# Altium PCB USB_UART_C.PcbDoc
Units mm, origin at the board's own origin, x right, y up, seen from the top; angles counter-clockwise.
Board outline 18.16 x 15.75 mm, 4 copper layers (Top Layer, Layer 1, Layer 2, Bottom Layer), stack 0.603 mm thick; 22 components, 21 nets, 107 pads, 34 vias.
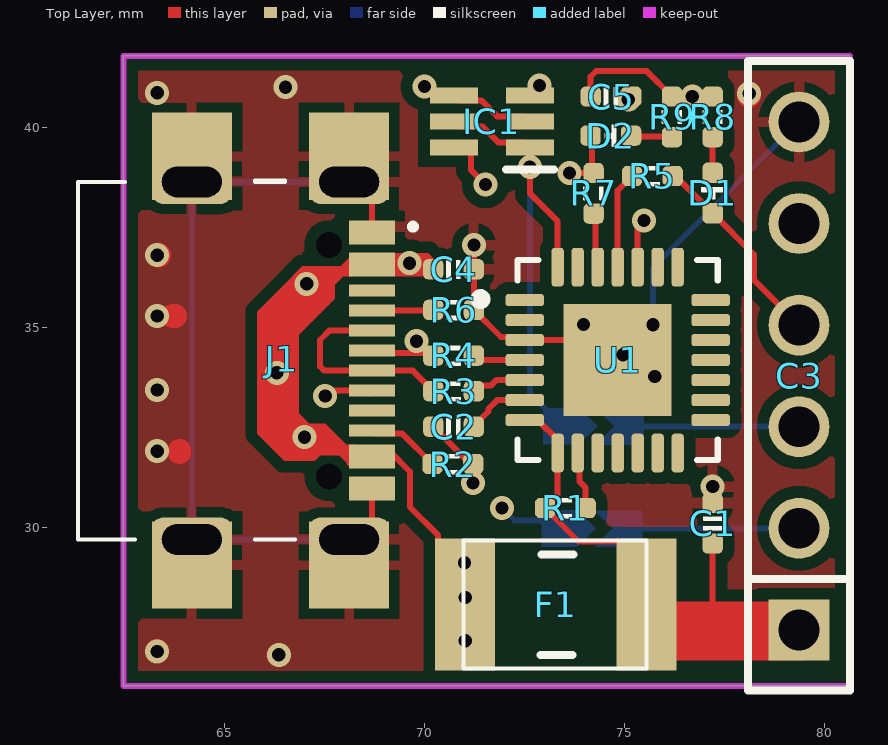
[diagram p0: Top Layer view]
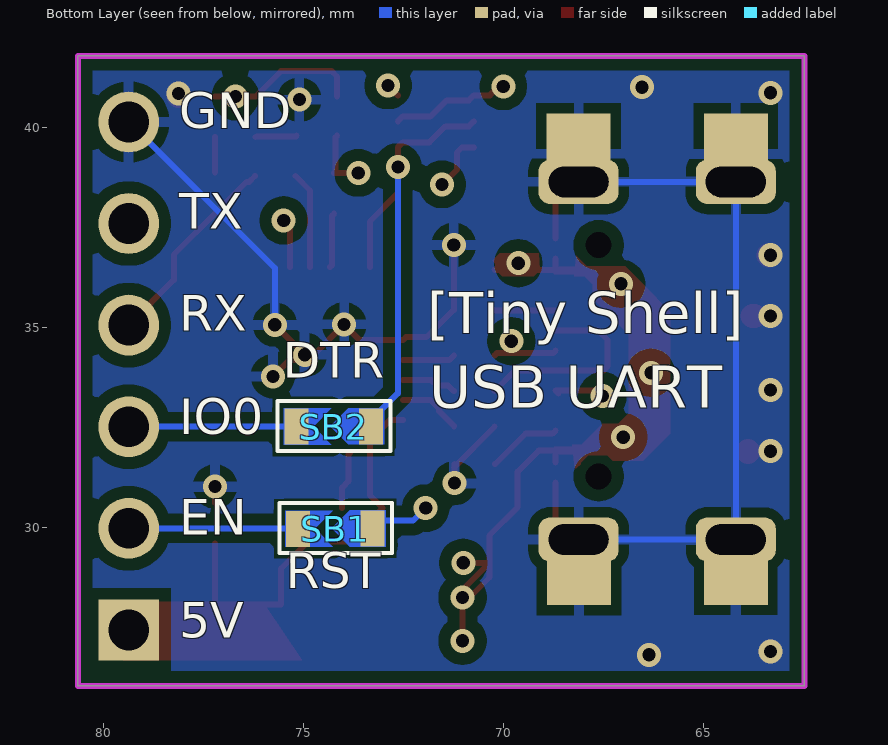
[diagram p1: Bottom Layer view, seen from below]
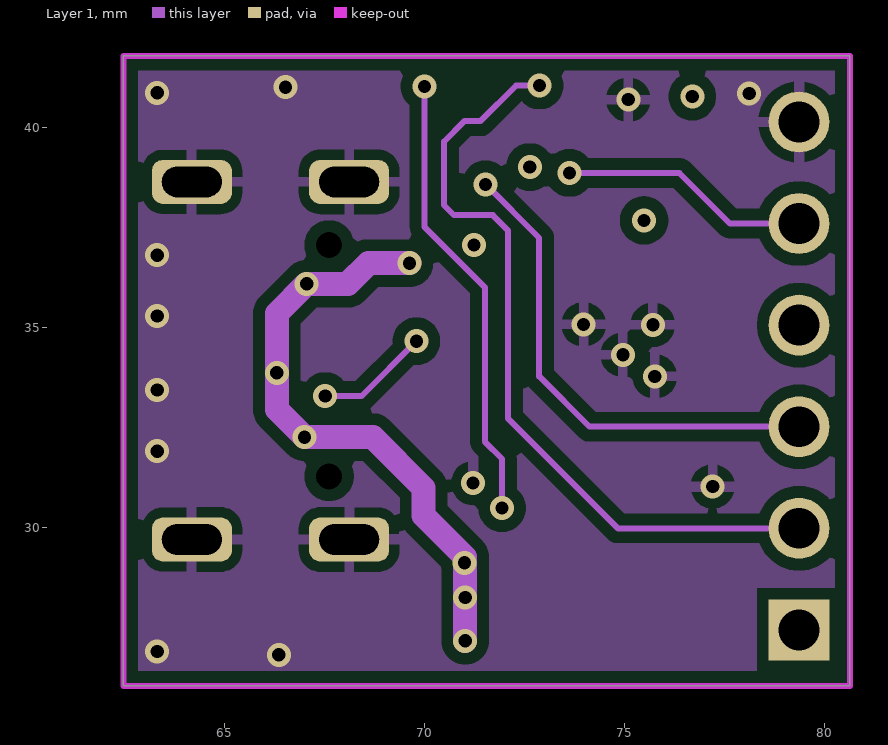
[diagram p2: Layer 1]
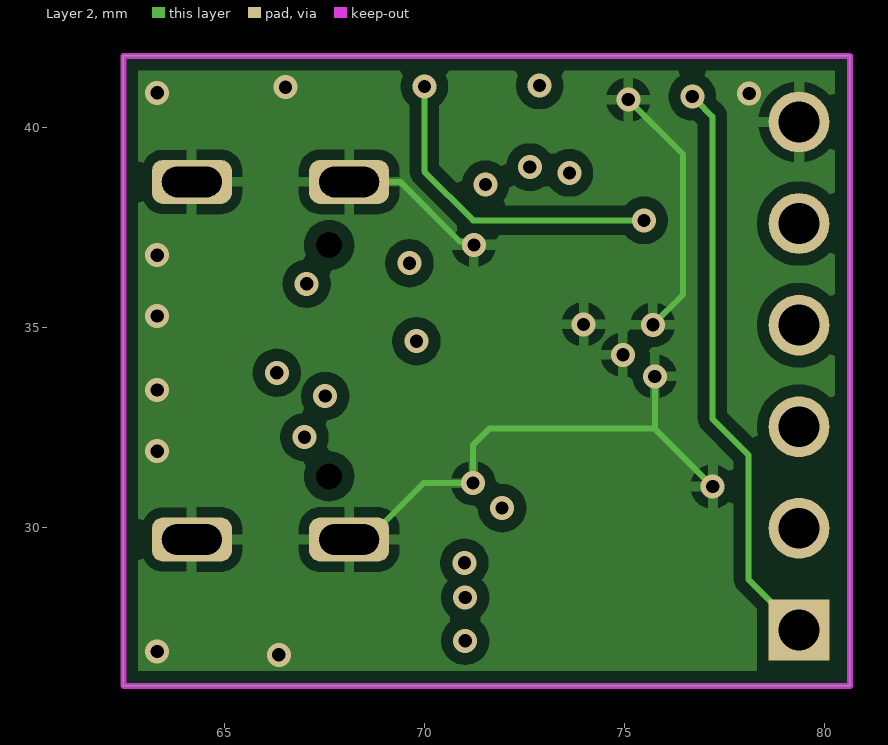
[diagram p3: Layer 2]
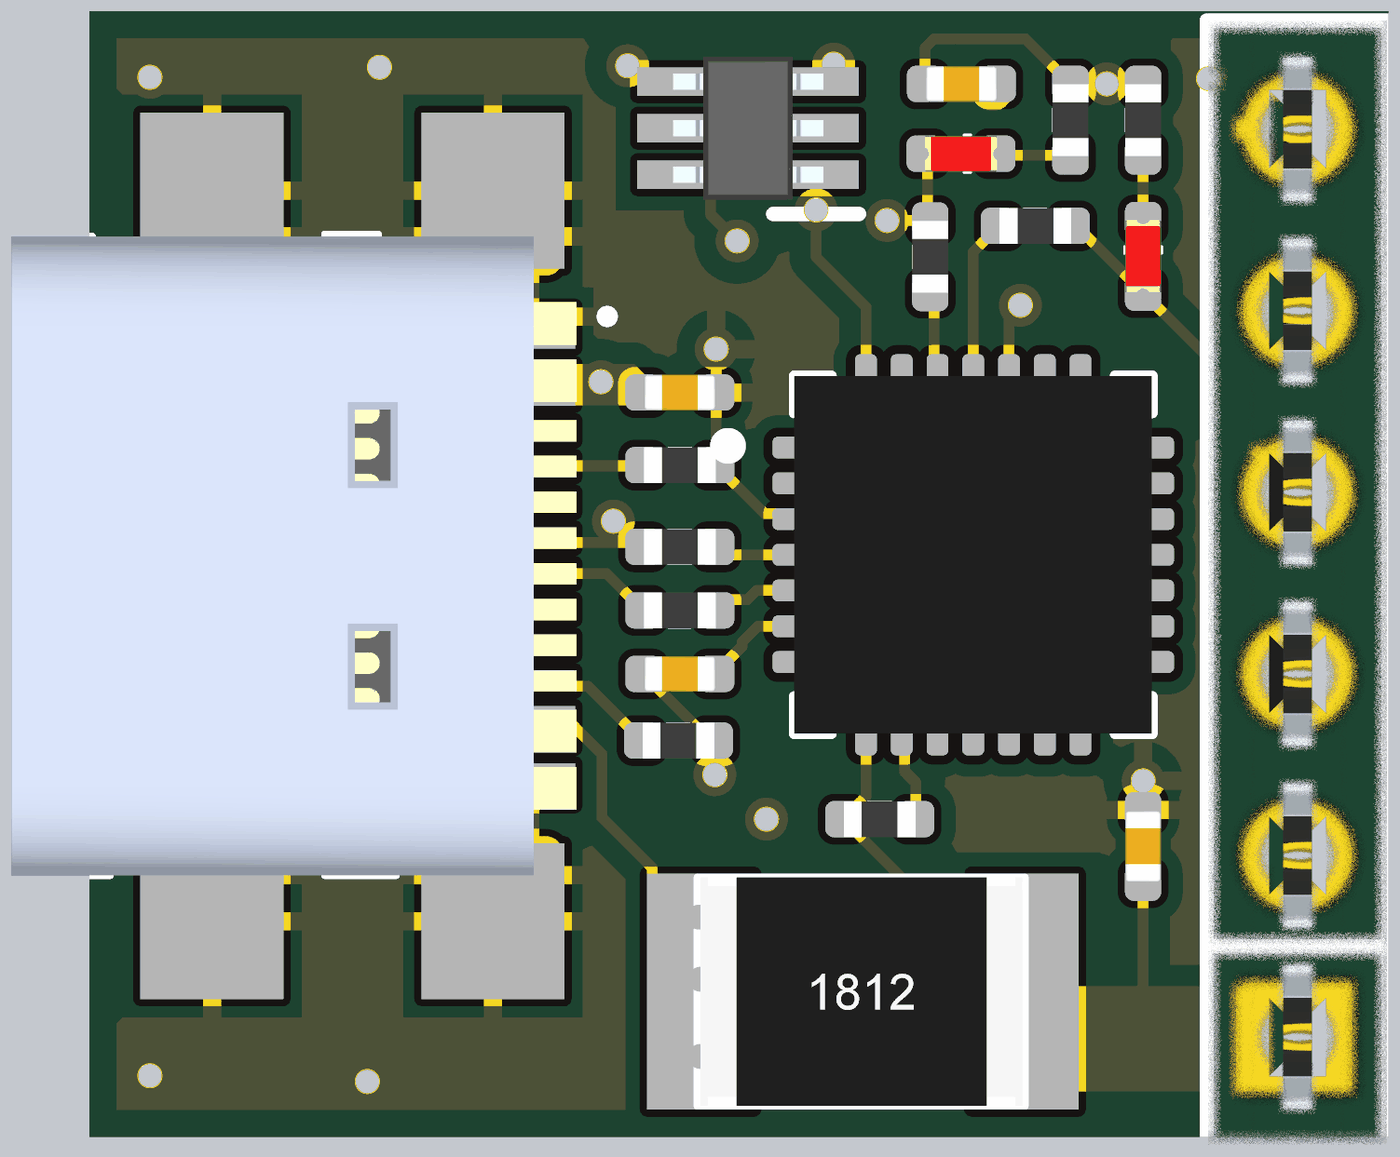
[diagram p4: 3D render of the assembled board from above, using the file's embedded part models]

## Layer stack, top to bottom
Top Solder: solder mask 0.0102, Solder Resist, Dk 3.5
Top Layer: signal copper 0.0356
Dielectric 2: prepreg 0.0711, PP-006, Dk 4.1
Layer 1: signal copper 0.035
Dielectric 1: dielectric 0.32, FR-4, Dk 4.8
Layer 2: signal copper 0.035
Dielectric 3: prepreg 0.0711, PP-006, Dk 4.1
Bottom Layer: signal copper 0.0356
Bottom Solder: solder mask 0.0102, Solder Resist, Dk 3.5

## Board outline
62.484,26.035 80.645,26.035 80.645,41.783 62.484,41.783

## Design rules (kind name [scope] priority, off if disabled: settings)
Clearance [All] p1: gap=0.18 ignorepadtopadclearanceinfootprint=FALSE
PolygonConnect [All] p1: connectstyle=Relief reliefconductorwidth=0.254 reliefentries=4 polygonreliefangle="90 Angle" airgapwidth=0.254
RoutingVias [All] p1: holewidth=0.33 width=0.6 viastyle="Through Hole" minholewidth=0.33 minwidth=0.6 maxholewidth=0.33 maxwidth=0.6
SolderMaskExpansion [All] p1: expansion=0.102 istentingtop=FALSE
Width [All] p1: maxlimit=0.6 minlimit=0.15 preferedwidth=0.2
30 further rules are at their usual default settings.

## Classes and differential pairs
component class USB_UART_C: C1 C2 C3 C4 C5 D1 D2 F1 IC1 J1 R1 R3 R5 R7 R8 R9 SB1 SB2 U1

## Components (designator, comment, footprint, x,y, rotation, side; value= is the part's Value field where it differs from the comment)
C1 "104" CAP_0402 77.216,30.099 r90 top value=103
C2 "104" CAP_0402 70.739,32.512 r0 top value=103
C3 "JP6" JP6-C1T 79.375,27.432 r90 top
C4 "106" CAP_0402 70.739,36.449 r0 top value=103
C5 "106" CAP_0402 74.676,40.767 r0 top value=103
D1 "color?" LED_0402_RED 77.216,38.354 r270 top
D2 "color?" LED_0402_RED 74.67,39.79 r180 top
F1 "Fuse" RES-SMD-1812 73.025,28.067 r0 top
IC1 "2N7002DW" SOT65P210X110-6N 71.694,40.147 r180 top
J1 "USB4110-GF-A" USB4110GFA 65.024,34.163 r270 top locked
R1 "5K1" RES_0402 73.533,30.48 r180 top
R2 "5K1" RES_0402 70.72,31.58 r0 top
R3 "22R" RES_0402 70.739,33.401 r0 top
R4 "22R" RES_0402 70.739,34.29 r0 top
R5 "200R" RES_0402 75.71,38.78 r0 top
R6 "5K1" RES_0402 70.739,35.433 r0 top
R7 "200R" RES_0402 74.24,38.348 r90 top
R8 "5K1" RES_0402 77.216,40.259 r90 top
R9 "5K1" RES_0402 76.2,40.259 r90 top
SB1 "SB" SB_0603 72.689,31.157 r0 bottom
SB2 "SB" SB_0603 72.729,33.708 r0 bottom
U1 "CP2102" QFN-28 74.841,34.179 r0 top value=Value

## Footprints (in the part's own frame and the unit in brackets; to place one, negate y for a bottom-side part, rotate by r counter-clockwise, add the part's x,y. Pads: shape width x height; smd on the part's side, far side on the other; paste and mask are expansions set on the pad)
CAP_0402 [mil]
  rrect50% 20x20 smd: 1(-20,0) 2(20,0)
  silkscreen extent -7,-9 7,9, body extent -20,-10 20,10, height 20
JP6-C1T [mm] "6 row, straight, gold plating"
  rect 1.52x1.52 hole 1.02: 1(0,0)
  round 1.52 hole 1.02: 2(2.54,0) 3(5.08,0) 4(7.62,0) 5(10.16,0) 6(12.7,0)
  silkscreen extent -1.52,-1.27 14.22,1.27, body extent -1.52,-1.25 14.22,1.25, height 8.51
LED_0402_RED [mil]
  rrect50% 20x20 smd: 1(-20,0) 2(20,0)
  silkscreen extent -6,-11 6,10, body extent -20,-10 20,10, height 18
QFN-28 [mil]
  rrect50% 38x12 smd mask+5: 1(-91.5,59.06) 2(-91.5,39.37) 3(-91.5,19.69) 4(-91.5,0) 5(-91.5,-19.68) 6(-91.5,-39.37) 7(-91.5,-59.06) 15(91.5,-59.06) 16(91.5,-39.37) 17(91.5,-19.68) 18(91.5,0) 19(91.5,19.69) 20(91.5,39.37) 21(91.5,59.06)
  rrect50% 12x38 smd mask+5: 8(-59.06,-91.5) 9(-39.37,-91.5) 10(-19.68,-91.5) 11(0,-91.5) 12(19.68,-91.5) 13(39.37,-91.5) 14(59.06,-91.5) 22(59.06,91.5) 23(39.37,91.5) 24(19.68,91.5) 25(0,91.5) 26(-19.68,91.5) 27(-39.37,91.5) 28(-59.06,91.5)
  rect 106.3x110.24 smd: 29(0,0)
  silkscreen extent -140,-98 98,98, body extent -98,-98 98,98, height 35
RES-SMD-1812 [mm] "Chip Capacitor, Body 3.2x2.5mm, IPC Medium Density"
  rect 1.5x3.3 smd: 1(-1.996,0) 2(2.54,0)
  silkscreen extent -2.04,-1.6 2.54,1.6, body extent -2,-1.6 2.5,1.6, height 0.6
RES_0402 [mil]
  rrect50% 20x20 smd: 1(-20,0) 2(20,0)
  silkscreen extent -7,-10 7,10, body extent -20,-10 20,10, height 14
SB_0603 [mm]
  rect 0.6x0.9 smd mask+0: 1(0.59,1.185) 2(2.455,1.196)
  Top Layer region: 0.254,1.64 1.157,1.64 1.609,1.189 1.157,0.737 0.256,0.739
  Top Layer region: 1.58,1.644 2.025,1.185 1.58,0.74 2.766,0.74 2.766,1.644
  silkscreen extent 0.11,0.56 2.92,1.81, body extent 0.66,0.79 2.26,1.59, height 0.43
SOT65P210X110-6N [mm]
  rect 1.2x0.4 smd: 1(-0.95,0.65) 2(-0.95,0) 3(-0.95,-0.65) 4(0.95,-0.65) 5(0.95,0) 6(0.95,0.65)
  silkscreen extent -1.55,1.2 -0.35,1.2, body extent -1.05,-1 1.05,1, height 1.1
USB4110GFA [mm]
  rect 2x1.6 smd far side: 1(-5.176,-0.827) 2(-5.176,3.103) 19(5.105,3.094) 20(5.105,-0.827)
  rect 2.18x2 smd: 1(-5.11,-0.827) 2(-5.11,3.103) 19(5.11,3.103) 20(5.11,-0.827)
  rrect50% 1.1x2 hole 1.5 slot 0.762 at 0 deg: 1(-4.47,-0.827) 2(-4.47,3.103) 19(4.47,3.103) 20(4.47,-0.827)
  rect 0.3x1.15 smd: 3(-3.35,3.678) 4(-3.05,3.678) 5(-2.55,3.678) 6(-2.25,3.678) 7(-1.75,3.678) 8(-1.25,3.678) 9(-0.75,3.678) 10(-0.25,3.678) 11(0.25,3.678) 12(0.75,3.678) 13(1.25,3.678) 14(1.75,3.678) 15(2.25,3.678) 16(2.55,3.678) 17(3.05,3.678) 18(3.35,3.678)
  round 0.325 hole 0.65 unplated: MH1(-2.89,2.603) MH2(2.89,2.603)
  silkscreen extent -4.5,-3.68 4.47,4.75, body extent -4.47,-3.63 4.47,4.27, height 3.2

## Part data
C1 C2 C4 C5: library part CM, "Cap SMD"
C3: "WR-PHD 2.54 mm Angled Socket Header", Manufacturer="W¨¹rth Elektronik eiSos GmbH", partNo=613006143121, ComponentLink1 Description=Manufacturer, ComponentLink1URL=http://www.we-online.com, ComponentLink2 Description=Datasheet, ComponentLink2URL=http://katalog.we-online.de/em/datasheet/6130xx143121.pdf, Created by="Karrer Zheng", Created Date="29 March 2013", NoPins=06
D1 D2: library part LED_0402, "LED", Type=0402
F1: library part FUSE
IC1: "Integrated Circuit", Manufacturer_Name="ON Semiconductor", Mouser Part Number=512-2N7002DW, Arrow Part Number=2N7002DW, Arrow Price/Stock=https://www.arrow.com/en/products/2n7002dw/on-semiconductor?region=nac, Datasheet Link=https://datasheet.datasheetarchive.com/originals/distributors/Datasheets_SAMA/951ecc1ab16cbf3d5524c3c8fb4b034a.pdf, Height=1.1mm, Manufacturer_Part_Number=2N7002DW, Mouser Price/Stock=https://www.mouser.co.uk/ProductDetail/ON-Semiconductor/2N7002DW?qs=4aVxpR%2FL9VItb3yGt5CeZg%3D%3D
J1: "USB TYPE C", Manufacturer_Name="GCT (GLOBAL CONNECTOR TECHNOLOGY)", Arrow Part Number=USB4110-GF-A, Datasheet Link=https://gct.co/files/drawings/usb4110.pdf, Height=3.26mm, Manufacturer_Part_Number=USB4110-GF-A
R1 R2 R3 R4 R5 R6 R7 R8 R9: library part R, "Resistor R1/4W"
U1: "USB to TTL", MFG #1="SILICON LABS", PART DESC="SINGLE-CHIP USB TO UART BRIDGE, QFN28, RoHS.", Part Number=CP2102, RefDes=RefDes, Type=DEV

## Via types
v1: diameter 0.6, hole 0.33, Top Layer to Bottom Layer, tented both sides, 34 vias

## Nets (pads, with @x,y where several pads share a name; then routed paths per layer and width w, separated by ;. In a path a pad name is that pad's centre, name@x,y a point inside that pad or via, vN(x,y) a via of type N, cw(c..) or ccw(c..) an arc to the next point about the centre after c; other vN are vias at no path point)
CP_RX: C3.4 D1.2 R5.2 | length 5.1
  Top Layer w0.15: R5.2 76.365,38.633 76.429,38.633 D1.2 78.245,36.817 78.245,36.182 C3.4
CP_TX: C3.5 D2.2 R7.2 | length 7.8
  Top Layer w0.15: v1(73.636,38.856) R7.2 74.201,38.895 74.201,39.751 D2.2
  Layer 1 w0.15: v1(73.636,38.856) 76.384,38.856 77.648,37.592 C3.5
CP_USB_DM: R3.2 U1.5 | length 1.4
  Top Layer w0.15: R3.2 71.394,33.548 71.678,33.548 71.809,33.679 U1.5
CP_USB_DP: R4.2 U1.4 | length 1.3
  Top Layer w0.15: R4.2 71.358,34.179 U1.4
DTR: IC1.1 IC1.5 SB2.1 U1.28 | length 13.1
  Top Layer w0.15: IC1.5 70.869,40.022 71.458,40.022 71.858,39.622 72.519,39.622 IC1.1 v1(72.644,39.004) 72.644,38.346 73.341,37.649 U1.28
  Bottom Layer w0.15: v1(72.644,39.004) 72.644,33.348 73.319,32.673 SB2.1 SB2.1@73.319,32.49 ; SB2.1@73.094,32.148 73.319,32.373 SB2.1@73.319,32.49 ; SB2.1@73.291,32.49 SB2.1@73.319,32.49 ; 73.75,32.49 SB2.1@73.319,32.49
EN: C3.2 IC1.3 SB1.2 | length 25
  Top Layer w0.15: IC1.3 v1(72.89,41.043)
  Layer 1 w0.15: 70.5,38.77 70.5,38.05 ; v1(72.89,41.043) 72.303,41.043 71.41,40.15 71.01,40.15 70.5,39.64 70.5,38.05 ; C3.2 74.848,29.972 72.105,32.715 72.105,37.415 71.72,37.8 70.75,37.8 70.5,38.05
  Bottom Layer w0.15: SB1.2@75.144,30.111 SB1.2 75.155,29.972 C3.2
GND: C1.2 C2.1 C3.6 C4.2 C5.2 J1.1 J1.2 J1.3 J1.4 J1.17 J1.18 J1.19 J1.20 R2.2 R6.2 U1.3 U1.29 | length 60.8
  Top Layer w0.15: J1.19@68.127,29.693 68.242,29.693 68.702,30.153 J1.18 J1.17 ; J1.2@68.127,38.633 68.242,38.633 68.702,38.173 J1.3 J1.4 ; C2.1 R2.2@71.228,31.515 ; v1(71.228,31.102) R2.2@71.228,31.515 ; R2.2 R2.2@71.228,31.515 ; R2.2@71.247,31.496 R2.2@71.228,31.515 ; v1(71.247,37.057) C4.2 R6.2 71.924,34.756 72.44,34.756 U1.3 73.599,34.679 v1(73.99,35.07) U1.29@74.841,34.219 ; v1(75.107,40.69) C5.2 ; v1(75.722,35.06) v1(74.972,34.31) U1.29 75.361,34.179 v1(75.77,33.77) ; C1.2 v1(77.216,31.016)
  Top Layer w0.6: v1(63.33,26.89) v1@63.33,26.91 ; v1@63.38,36.79 v1@63.38,36.8 ; 63.73,35.28 63.78,35.28 ; 63.89,31.88 63.89,31.9 ; v1@66.36,26.81 v1(66.37,26.81) ; v1@78.13,40.78 v1(78.13,40.84)
  Layer 2 w0.15: J1.19@68.127,29.693 68.577,29.693 69.986,31.102 v1(71.228,31.102) 71.228,32.058 71.632,32.462 75.77,32.462 ; J1.2@68.127,38.633 69.407,38.633 70.897,37.143 71.161,37.143 v1(71.247,37.057) ; v1(75.107,40.69) 76.48,39.317 76.48,35.818 v1(75.722,35.06) ; v1(75.77,33.77) 75.77,32.462 ; v1(77.216,31.016) 75.77,32.462
  Bottom Layer w0.15: J1.19@68.127,29.693 64.197,29.693 64.197,38.633 J1.2@68.127,38.633 ; v1(75.722,35.06) 75.722,36.479 C3.6
  other v1: 63.33,31.9 63.33,33.43 63.33,35.28 63.33,36.8 63.33,40.86 66.54,41
GPIO0: C3.3 IC1.6 SB2.2 | length 18
  Top Layer w0.15: IC1.6 71.044,39.497 71.169,39.372 71.169,38.941 v1(71.54,38.57)
  Layer 1 w0.15: v1(71.54,38.57) 72.88,37.23 72.88,33.77 74.138,32.512 C3.3
  Bottom Layer w0.15: SB2.2 C3.3
NetC2_2: C2.2 U1.6 | length 1.6
  Top Layer w0.15: C2.2 71.247,32.535 71.611,32.899 71.611,32.961 71.829,33.179 U1.6
NetD1_1: D1.1 R8.1 | length 0.9
  Top Layer w0.15: D1.1 R8.1
NetD2_1: D2.1 R9.1 | length 1
  Top Layer w0.15: D2.1 75.198,39.77 76.181,39.77 R9.1
NetJ1_8: J1.8 R6.1 | length 1.5
  Top Layer w0.15: J1.8 68.712,35.423 70.221,35.423 R6.1
NetJ1_9: J1.9 J1.11 R3.1 | length 5.1
  Top Layer w0.15: J1.9 67.633,34.913 67.4,34.68 67.4,34.02 67.507,33.913 J1.11 69.719,33.913 R3.1
NetJ1_10: J1.10 J1.12 R4.1 | length 6.1
  Top Layer w0.15: v1(67.53,33.28) 67.663,33.413 J1.12 J1.12@68.627,33.338 ; J1.10 68.763,34.351 v1@69.81,34.351 ; v1(69.81,34.65) v1@69.81,34.351 ; R4.1 70.17,34.351 v1@69.81,34.351
  Layer 1 w0.15: v1(67.53,33.28) 68.44,33.28 v1(69.81,34.65)
NetJ1_14: J1.14 R2.1 | length 1.9
  Top Layer w0.15: J1.14 68.777,32.338 69.454,32.338 R2.1
NetR1_1: R1.1 U1.9 | length 1.5
  Top Layer w0.15: U1.9 73.883,31.813 73.883,31.147 74.041,30.99 R1.1
NetR5_1: R5.1 U1.25 | length 2.4
  Top Layer w0.15: U1.25 74.841,38.419 R5.1
NetR7_1: R7.1 U1.26 | length 1.4
  Top Layer w0.15: R7.1 74.291,37.789 74.291,36.554 U1.26
RTS: IC1.2 IC1.4 SB1.1 U1.24 | length 25.2
  Top Layer w0.15: v1(70.01,41.02) 70.121,41.02 70.344,40.797 IC1.4 70.869,40.672 71.428,40.672 71.828,40.272 72.519,40.272 IC1.2 ; U1.24 75.341,37.511 v1(75.5,37.67)
  Layer 1 w0.15: v1(70.01,41.02) 70.01,37.509 71.52,35.999 71.52,32.14 71.95,31.71 v1(71.95,30.48)
  Layer 2 w0.15: v1(70.01,41.02) 70.01,38.89 71.23,37.67 v1(75.5,37.67)
  Bottom Layer w0.15: v1(71.95,30.48) 72.263,30.167 73.084,30.167 SB1.1
TYPEC_VUSB: C4.1 F1.1 J1.5 J1.6 J1.15 J1.16 | length 33
  Top Layer w0.15: v1@66.32,33.85 v1(66.32,33.86) ; J1.16 J1.15 69.127,31.913 69.65,31.39 69.65,30.5 70.354,29.796 F1.1@70.354,29.11 ; J1.5 J1.6 68.72,36.431 v1@69.466,36.431 ; v1(69.635,36.6) v1@69.466,36.431 ; C4.1 70.213,36.431 v1@69.466,36.431 ; v1(71.01,29.11) F1.1@70.354,29.11 ; v1(71.029,27.161) F1.1 ; F1.1@70.354,29.11 70.354,28.742 F1.1 ; F1.1@70.354,29.11 71.029,28.435 v1(71.029,28.241) F1.1
  Top Layer w0.2: v1(67.011,32.251) v1@67.079,32.251 ; J1.15 67.417,31.913 v1@67.079,32.251 ; J1.6 67.393,36.413 v1(67.067,36.087) 66.74,35.76 66.74,32.59 v1@67.079,32.251
  Layer 1 w0.6: v1(69.635,36.6) 68.608,36.6 68.094,36.087 v1(67.067,36.087) 66.32,35.34 v1(66.32,33.86) 66.32,32.943 v1(67.011,32.251) 68.719,32.251 69.99,30.98 69.99,30.29 71.029,29.251 v1(71.029,28.241) v1(71.029,27.161)
VCC5V: C1.1 C3.1 C5.1 F1.2 R1.2 R8.2 R9.2 U1.7 U1.8 | length 30.9
  Top Layer w0.15: U1.7 72.847,32.679 73.341,32.185 U1.8 73.341,30.796 R1.2 73.863,29.642 74.89,29.642 75.565,28.967 F1.2 77.153,28.067 ; C5.1 74.168,41.268 74.3,41.4 75.567,41.4 R9.2 v1(76.708,40.767) R8.2 ; C1.1 77.216,28.13 77.153,28.067 ; C3.1 78.74,28.067 77.153,28.067
  Layer 2 w0.15: v1(76.708,40.767) 76.803,40.767 76.803,40.672 77.21,40.265 77.21,32.71 78.11,31.81 78.11,28.697 C3.1
pads on no net: J1.7 J1.13 J1.MH1 J1.MH2 U1.1 U1.2 U1.10 U1.11 U1.12 U1.13 U1.14 U1.15 U1.16 U1.17 U1.18 U1.19 U1.20 U1.21 U1.22 U1.23 U1.27

## Polygon pours and split planes (outlines as drawn)
GND on Bottom Layer "GND_L04_P000" (solid, remove dead copper, pour order 0): 62.48,41.78 62.48,26.03 80.65,26.03 80.65,41.78 80.46,41.78
GND on Layer 2 "GND_L03_P001" (solid, remove dead copper, pour order 1): 62.48,41.78 62.48,26.03 80.65,26.03 80.65,41.78 80.6,41.78
GND on Layer 1 "GND_L02_P002" (solid, remove dead copper, pour order 2): 62.49,41.78 62.49,26.04 80.64,26.04 80.64,41.78 80.53,41.78
GND on Top Layer "GND_L01_P004" (solid, remove dead copper, pour order 4): 62.49,41.78 62.49,26.03 80.65,26.03 80.65,41.78 80.47,41.78

## Keep-outs
Keep-Out Layer:
  lines w0.152: 62.484,26.035 71.374,26.035 80.645,26.035 80.645,41.783 62.484,41.783 62.484,38.1 62.484,26.035

## Other copper
Top Layer:
  region net TYPEC_VUSB: 69.12,36.85 70.1,36.85 70.29,36.66 70.213,36.583 70.213,36.431 70.191,36.431 70.03,36.27 69.254,36.27 69.093,36.431
  region net TYPEC_VUSB: 66.5,36.06 65.83,35.39 65.83,32.34 66.51,31.66 67.035,31.66 67.035,32.49 67.135,32.59 66.87,32.855 66.87,34.81 67.61,35.55 67.23,35.93 67.23,36.25
  region net TYPEC_VUSB: 68.28,32.06 68.06,32.06 67.53,32.59 66.74,32.59 66.57,32.42 66.57,31.89 66.8,31.66 67.27,31.66 67.41,31.8 67.88,31.8 68.07,31.61 68.07,31.58 68.18,31.47 68.22,31.47
  region net TYPEC_VUSB: 68.183,36.783 67.92,36.52 66.96,36.52 66.5,36.06 66.5,35.58 66.53,35.55 67.61,35.55 67.77,35.71 67.77,36.06 67.98,36.27 68.23,36.27
  region net VCC5V: 75.96,28.05 76,28.09 79.43,28.09 79.43,26.76 79.51,26.68 79.5,26.67 75.04,26.67

## Silkscreen, mask and mechanical layers (free items; w line width, h text height)
Bottom Overlay:
  text "GND" at 78.11,39.678 h1.52
  text "TX" at 78.11,37.16 h1.52
  text "RX" at 78.11,34.61 h1.52
  text "[Tiny Shell]" at 71.91,34.51 h1.75
  text "DTR" at 75.52,33.44 h1.52
  text "USB UART" at 71.86,32.632 h1.8
  text "IO0" at 78.11,32.028 h1.52
  text "EN" at 78.11,29.51 h1.52
  text "RST" at 75.45,28.168 h1.52
  text "5V" at 78.11,26.938 h1.52